# Altium PCB piezo-driver1.PcbDoc (part 1 of 2)
Units mm, origin at the board's own origin, x right, y up, seen from the top; angles counter-clockwise.
Board outline 53.7 x 52 mm, 2 copper layers (Top Layer, Bottom Layer), stack 1.569 mm thick; 104 components, 76 nets, 406 pads, 150 vias.
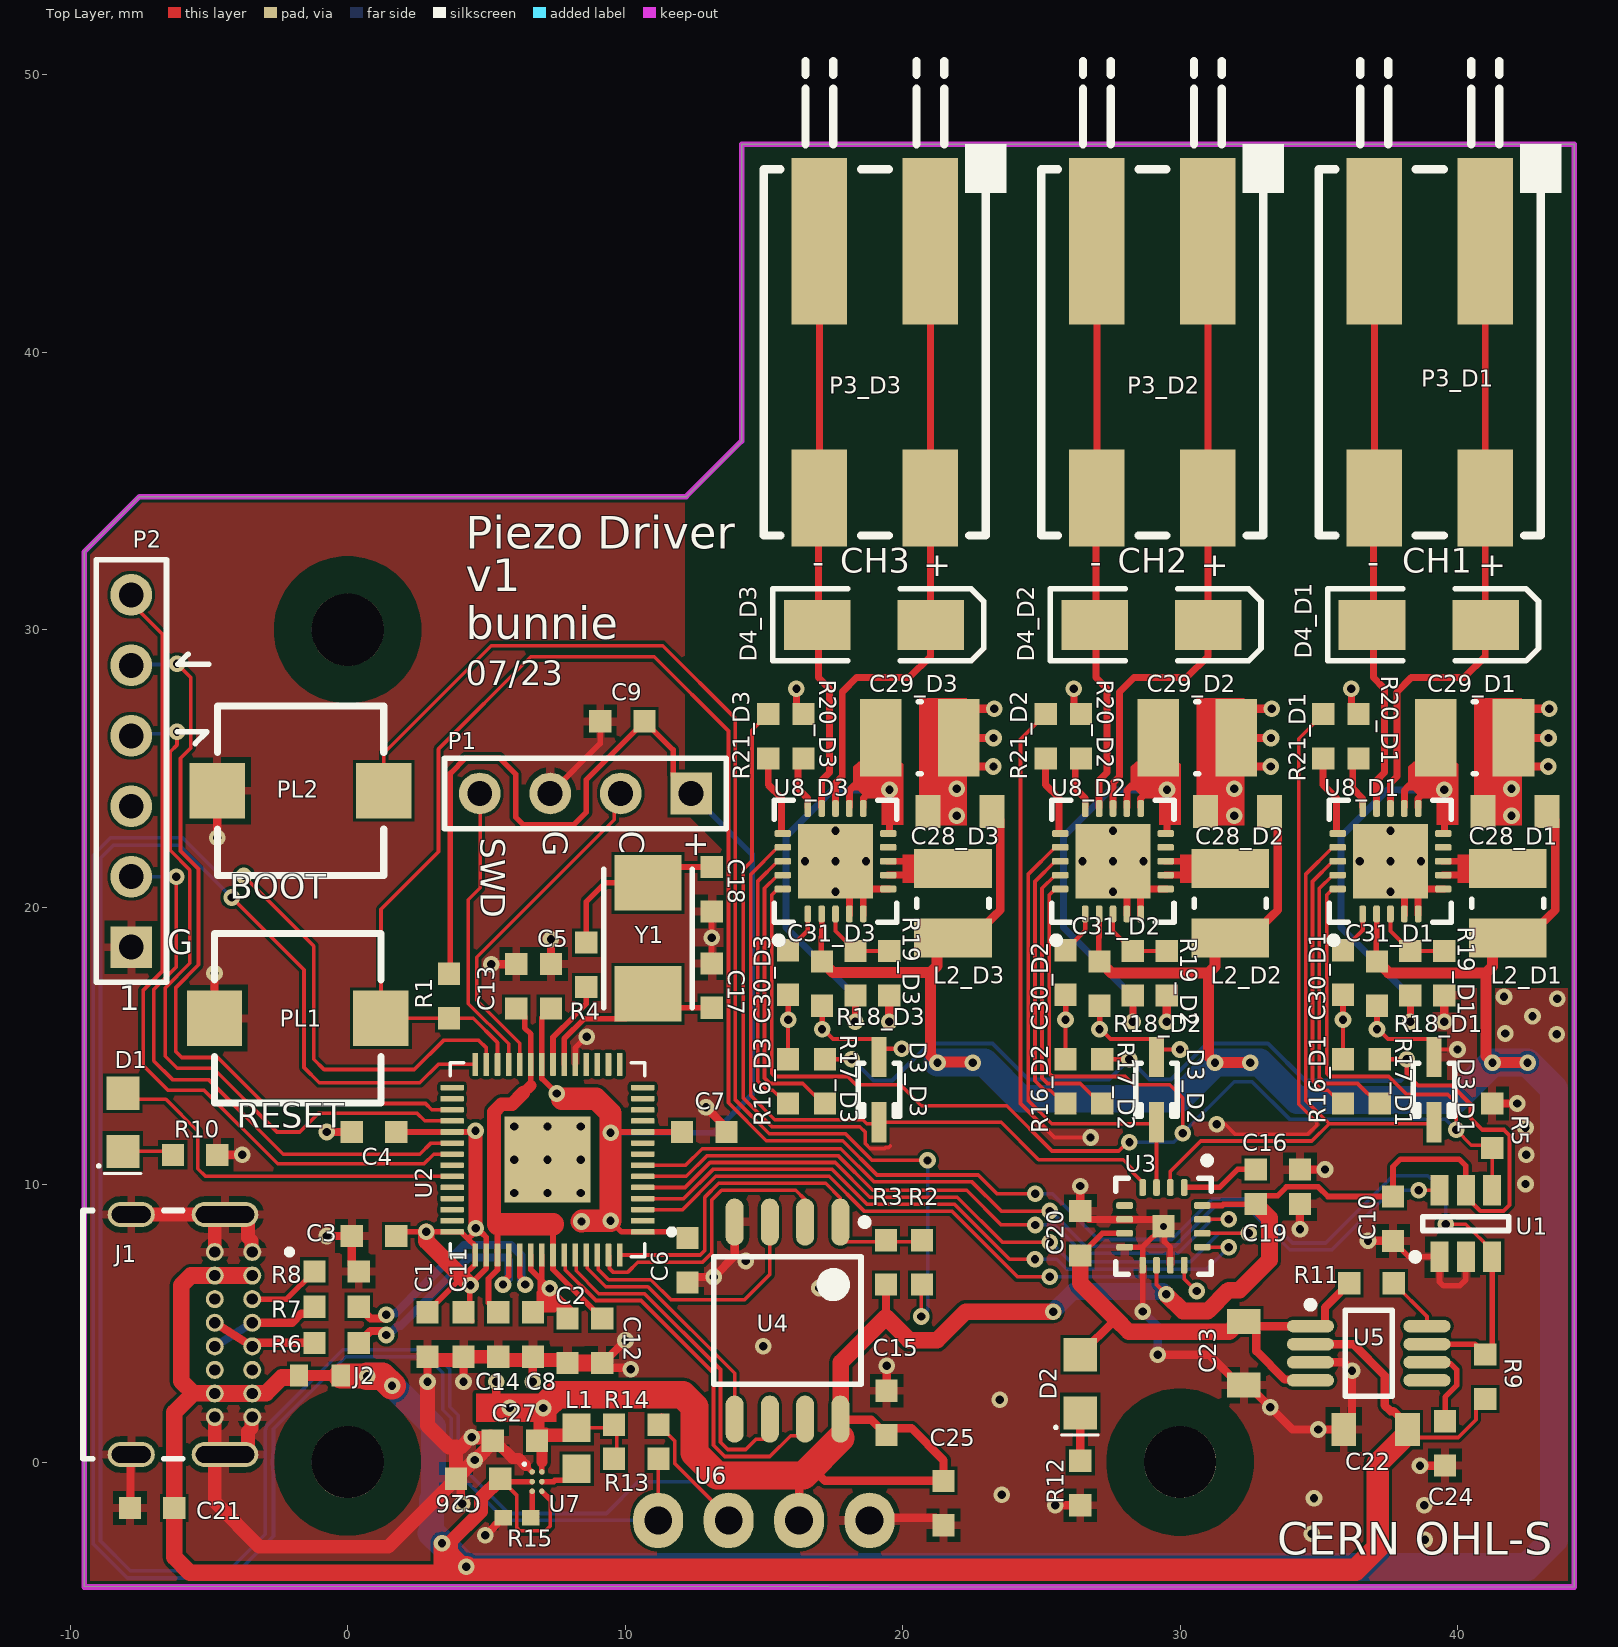
[diagram p0: Top Layer view]
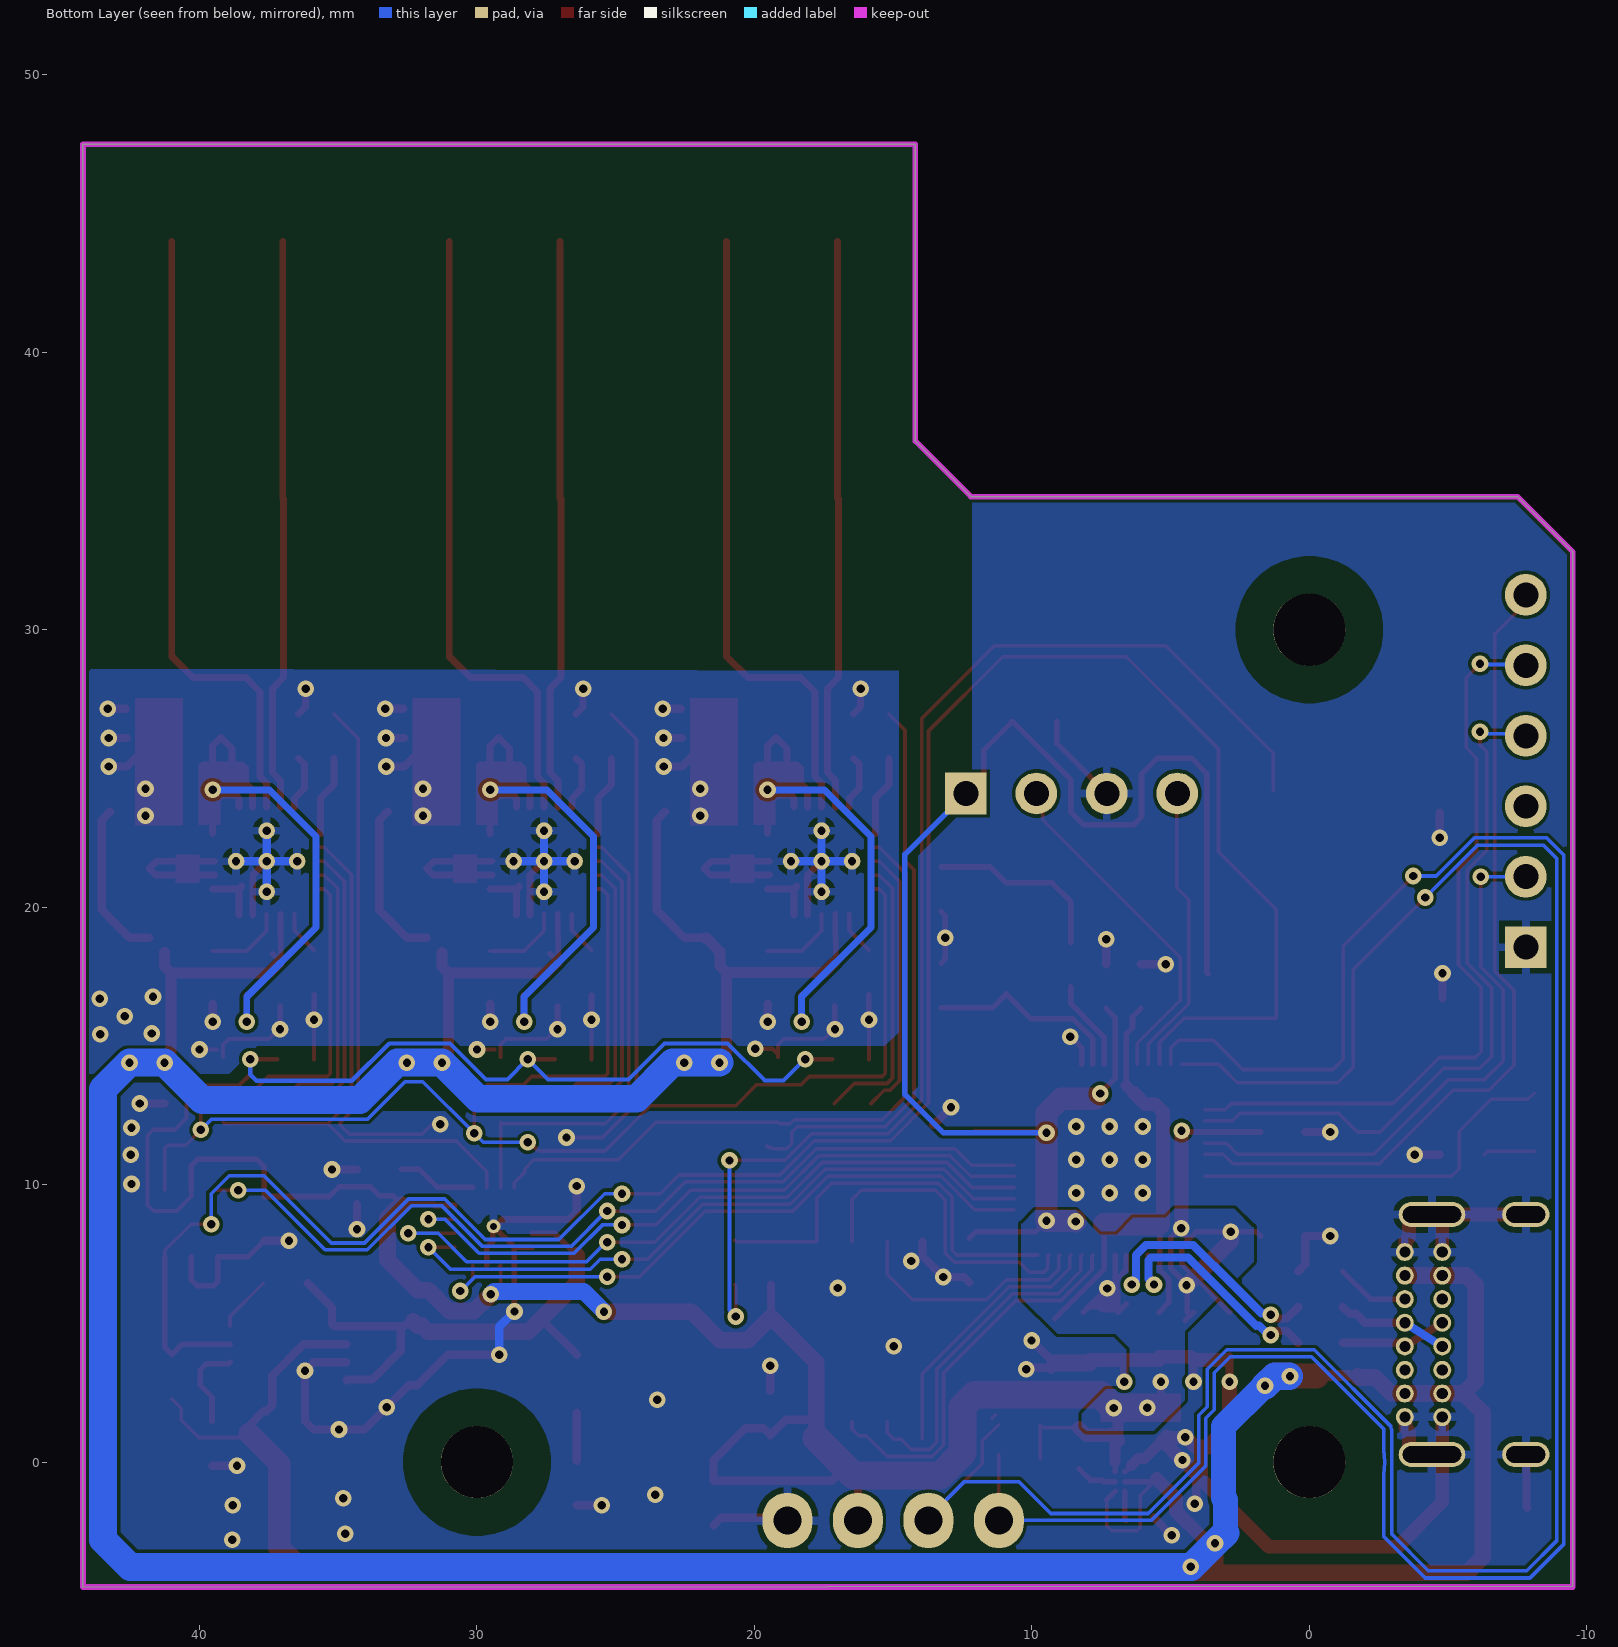
[diagram p1: Bottom Layer view, seen from below]

## Layer stack, top to bottom
Top Solder: solder mask 0.0254, SM-001, Dk 4
Top Layer: signal copper 0.035
Dielectric 1: core 1.4986, Core-043, Dk 4.3
Bottom Layer: signal copper 0.035
Bottom Solder: solder mask 0.0254, SM-001, Dk 4

## Board outline
-9.5,-4.475 -9.5,32.8 -7.5,34.8 12.2,34.8 14.2,36.8 14.2,47.5 44.2,47.5 44.2,-4.475 44.2,-4.5

## Design rules (kind name [scope] priority, off if disabled: settings)
Clearance [All vs IsPad and not PadIsPlated] p1: gap=1.35 ignorepadtopadclearanceinfootprint=FALSE except(0: Arc-Hole Track-Hole SMDPad-Hole THPad-Hole Via-Hole Fill-Hole Poly-Hole Region-Hole Text-Hole)
Clearance Clearance_1 [All] p2: gap=0.12 ignorepadtopadclearanceinfootprint=FALSE except(0: Arc-Hole Track-Hole SMDPad-Hole THPad-Hole Via-Hole Fill-Hole Poly-Hole Region-Hole Text-Hole)
ComponentClearance [All] p1 off: gap=0.254 collisioncheckmode=3 verticalgap=0.254 showdistances=FALSE
DiffPairsRouting [All] p1: maxlimit=0.3 minlimit=0.15 mostfreqgap=0.15 toplayer_minwidth=0.15 toplayer_maxwidth=0.8 toplayer_prefwidth=0.8 bottomlayer_minwidth=0.15 bottomlayer_maxwidth=0.8 bottomlayer_prefwidth=0.8 maxuncoupledlength=12.7
HoleSize [All] p1: absolutevalues=TRUE maxlimit=2.7 minlimit=0.025 maxpercent=80.000 minpercent=20.000
MinimumSolderMaskSliver [All] p1 off: minsoldermaskwidth=0.254
PolygonConnect [All] p1: thpad.connectstyle=Relief thpad.reliefconductorwidth=0.3 thpad.reliefentries=4 thpad.polygonreliefangle="90 Angle" thpad.airgapwidth=0.2 smdpad.connectstyle=Relief smdpad.reliefconductorwidth=0.3 smdpad.reliefentries=4 smdpad.polygonreliefangle="90 Angle" smdpad.airgapwidth=0.2 via.connectstyle=Direct via.reliefconductorwidth=0.254 via.reliefentries=4 via.polygonreliefangle="90 Angle" via.airgapwidth=0.254
RoomDefinition D3 [InComponentClass('D3')] p1: confinementstyle=ConfineIn formatcopy=TRUE lockcomponents=FALSE outline 14.273,11.199 24.223,11.199 24.223,50.924 14.273,50.924
RoomDefinition D2 [InComponentClass('D2')] p2: confinementstyle=ConfineIn formatcopy=TRUE lockcomponents=FALSE outline 24.273,11.199 34.223,11.199 34.223,50.924 24.273,50.924
RoomDefinition D1 [InComponentClass('D1')] p3: confinementstyle=ConfineIn formatcopy=TRUE lockcomponents=FALSE outline 34.273,11.199 44.223,11.199 44.223,50.924 34.273,50.924
RoutingVias [All] p1: holewidth=0.3 width=0.6 viastyle="Through Hole" minholewidth=0.3 minwidth=0.6 maxholewidth=0.3 maxwidth=0.6
SilkToSilkClearance [All] p1 off: silktosilkclearance=0.254
SilkToSolderMaskClearance [IsPad] p1 off: minsilkscreentomaskgap=0.254 clearancetoexposedcopper=TRUE
SolderMaskExpansion [All] p1: expansion=0.07 istentingtop=FALSE
Width [All] p1: maxlimit=5 minlimit=0.13 preferedwidth=0.15
24 further rules are at their usual default settings.

## Classes and differential pairs
channel class driver: D1 D2 D3
component class D3: C28_D3 C29_D3 C30_D3 C31_D3 D3_D3 D4_D3 L2_D3 P3_D3 R16_D3 R17_D3 R18_D3 R19_D3 R20_D3 R21_D3 U8_D3
component class D2: C28_D2 C29_D2 C30_D2 C31_D2 D3_D2 D4_D2 L2_D2 P3_D2 R16_D2 R17_D2 R18_D2 R19_D2 R20_D2 R21_D2 U8_D2
component class D1: C28_D1 C29_D1 C30_D1 C31_D1 D3_D1 D4_D1 L2_D1 P3_D1 R16_D1 R17_D1 R18_D1 R19_D1 R20_D1 R21_D1 U8_D1
component class controller: C1 C2 C3 C4 C5 C6 C7 C8 C9 C10 C11 C12 C13 C14 C15 C16 C17 C18 C19 C20 C21 C22 C23 C24 C25 C26 C27 D1 D2 J1 J2 L1 NT1 P1 P2 PL1 PL2 R1 R2 R3 R4 R5 R6 R7 R8 R9 R10 R11 R12 R13 R14 R15 U1 U2 U3 U4 U5 U6 U7 Y1
differential pair USB: +USB_P -USB_N
differential pair RPUSB: +RPUSB_P -RPUSB_N

## Components (designator, comment, footprint, x,y, rotation, side; value= is the part's Value field where it differs from the comment)
C1 "0.1uF, 25V, X7R" B_CAP0603 2.875,4.6 r270 top
C2 "0.1uF, 25V, X7R" B_CAP0603 7.925,4.375 r270 top
C3 "0.1uF, 25V, X7R" B_CAP0603 0.95,8.15 r180 top
C4 "0.1uF, 25V, X7R" B_CAP0603 0.95,11.9 r180 top
C5 "0.1uF, 25V, X7R" B_CAP0603 7.325,17.15 r90 top
C6 "0.1uF, 25V, X7R" B_CAP0603 12.25,7.275 r270 top
C7 "2.2uF, 16V, X5R" B_CAP0603 12.852,11.905 r0 top
C8 "2.2uF, 16V, X5R" B_CAP0603 6.675,4.6 r270 top
C9 "0.1uF, 25V, X7R" B_CAP0603 9.9,26.7 r180 top
C10 "0.1uF, 25V, X7R" B_CAP0603 37.675,8.775 r270 top
C11 "2.2uF, 16V, X5R" B_CAP0603 4.175,4.6 r270 top
C12 "0.1uF, 25V, X7R" B_CAP0603 9.175,4.375 r270 top
C13 "0.1uF, 25V, X7R" B_CAP0603 6.075,17.15 r90 top
C14 "2.2uF, 16V, X5R" B_CAP0603 5.425,4.6 r270 top
C15 "0.1uF, 25V, X7R" B_CAP0603 19.425,1.775 r270 top
C16 "DNP" B_CAP0603 33.525,10.55 r0 top
C17 "15pF, 50V, NP0" B_CAP0603 13.125,17.175 r270 top
C18 "15pF, 50V, NP0" B_CAP0603 13.125,20.65 r90 top
C19 "0.1uF, 25V, X7R" B_CAP0603 33.525,9.3 r0 top
C20 "0.1uF, 25V, X7R" B_CAP0603 26.4,8.25 r90 top
C21 "10uF, 6.3V, X5R" B_CAP0603 -7.05,-1.65 r180 top
C22 "10uF, 25V, X5R" B_CAP0805 37.05,1.175 r180 top
C23 "10uF, 25V, X5R" B_CAP0805 32.3,3.925 r270 top
C24 "0.033uF, 50V, X7R" B_CAP0603 39.55,0.675 r90 top
C25 "2.2uF, 16V, X5R" B_CAP0603 21.475,-1.475 r270 top
C26 "10uF, 6.3V, X5R" B_CAP0603 4.7,-0.6 r180 top
C27 "10uF, 6.3V, X5R" B_CAP0603 6.025,0.775 r180 top
C28_D1 "10uF, 25V, X5R" B_CAP0805 42.068,23.447 r180 top (schematic designator C28)
C28_D2 "10uF, 25V, X5R" B_CAP0805 32.068,23.447 r180 top (schematic designator C28)
C28_D3 "10uF, 25V, X5R" B_CAP0805 22.068,23.447 r180 top (schematic designator C28)
C29_D1 "0.22uF, 250V X7R" B_CAP1210 40.619,26.114 r0 top (schematic designator C29)
C29_D2 "0.22uF, 250V X7R" B_CAP1210 30.619,26.114 r0 top (schematic designator C29)
C29_D3 "0.22uF, 250V X7R" B_CAP1210 20.619,26.114 r0 top (schematic designator C29)
C30_D1 "0.1uF, 25V, X7R" B_CAP0603 35.873,17.649 r270 top (schematic designator C30)
C30_D2 "0.1uF, 25V, X7R" B_CAP0603 25.873,17.649 r270 top (schematic designator C30)
C30_D3 "0.1uF, 25V, X7R" B_CAP0603 15.873,17.649 r270 top (schematic designator C30)
C31_D1 "0.1uF, 25V, X7R" B_CAP0603 37.098,17.249 r270 top (schematic designator C31)
C31_D2 "0.1uF, 25V, X7R" B_CAP0603 27.098,17.249 r270 top (schematic designator C31)
C31_D3 "0.1uF, 25V, X7R" B_CAP0603 17.098,17.249 r270 top (schematic designator C31)
D1 "white LED" B_LED0805 -8.1,12.25 r90 top
D2 "white LED" B_LED0805 26.4,2.825 r90 top
D3_D1 "BZX38450-C1V8F" SOD-323 39.148,13.424 r270 top (schematic designator D3)
D3_D2 "BZX38450-C1V8F" SOD-323 29.148,13.424 r270 top (schematic designator D3)
D3_D3 "BZX38450-C1V8F" SOD-323 19.148,13.424 r270 top (schematic designator D3)
D4_D1 "CDBA2200-HF" DSO-C2/X1.8 38.968,30.178 r0 top (schematic designator D4)
D4_D2 "CDBA2200-HF" DSO-C2/X1.8 28.968,30.178 r0 top (schematic designator D4)
D4_D3 "CDBA2200-HF" DSO-C2/X1.8 18.968,30.178 r0 top (schematic designator D4)
J1 "USB4085-GF-A_REVB" GCT_USB4085-GF-A_REVB -7.8,4.6 r270 top
J2 "power tap (DNP)" RESTAP-0603 -1,3.125 r0 top
L1 "0.47uH 0603" B_IND0603 8.25,0.5 r90 top
L2_D1 "3.3uH SRP3212A-3R3M" B_IND1210_BOURNES 41.814,20.145 r270 top (schematic designator L2)
L2_D2 "3.3uH SRP3212A-3R3M" B_IND1210_BOURNES 31.814,20.145 r270 top (schematic designator L2)
L2_D3 "3.3uH SRP3212A-3R3M" B_IND1210_BOURNES 21.814,20.145 r270 top (schematic designator L2)
P1 "Header 4" HDR1X4 12.38,24.1 r180 top
P2 "Male 2.54mm 6x1 header" HDR1X6 -7.8,18.56 r90 top
P3_D1 "2060-472/998-404" WAGO_2060-472/998-404 41,44 r270 top (schematic designator P3)
P3_D2 "2060-472/998-404" WAGO_2060-472/998-404 31,44 r270 top (schematic designator P3)
P3_D3 "2060-472/998-404" WAGO_2060-472/998-404 21,44 r270 top (schematic designator P3)
PL1 "6mm square tact" PANASONIC_EVPAS -1.8,16 r180 top
PL2 "6mm square tact" PANASONIC_EVPAS -1.7,24.2 r180 top
R1 "10k, 1%" B_RES0603 3.65,16.8 r270 top
R2 "1k, 1%" B_RES0603 20.7,7.2 r270 top
R3 "10k, 1%" B_RES0603 19.4,7.2 r270 top
R4 "1k, 1%" B_RES0603 8.6,17.925 r90 top
R5 "10k, 1%" B_RES0603 41.25,12.125 r90 top
R6 "27, 1%" B_RES0603 -0.4,4.3 r0 top
R7 "27, 1%" B_RES0603 -0.4,5.6 r0 top
R8 "5.1k, 1%" B_RES0603 -0.4,6.875 r180 top
R9 "DNP" B_RES0603 41,3.075 r90 top
R10 "51, 1%" B_RES0603 -5.5,11.075 r180 top
R11 "100k, 1%" B_RES0603 36.9,6.45 r180 top
R12 "51, 1%" B_RES0603 26.4,-0.75 r90 top
R13 "1k, 1%" B_RES0603 10.4,0.125 r180 top
R14 "1k, 1%" B_RES0603 10.4,1.35 r180 top
R15 "249k, 1%, +/-200ppm" B_RES0402 6.1,-2 r180 top
R16_D1 "10k, 1%" B_RES0603 35.873,13.724 r90 top (schematic designator R16)
R16_D2 "10k, 1%" B_RES0603 25.873,13.724 r90 top (schematic designator R16)
R16_D3 "10k, 1%" B_RES0603 15.873,13.724 r90 top (schematic designator R16)
R17_D1 "10k, 1%" B_RES0603 37.198,13.724 r270 top (schematic designator R17)
R17_D2 "10k, 1%" B_RES0603 27.198,13.724 r270 top (schematic designator R17)
R17_D3 "10k, 1%" B_RES0603 17.198,13.724 r270 top (schematic designator R17)
R18_D1 "820k, 1%" B_RES0603 38.298,17.624 r270 top (schematic designator R18)
R18_D2 "820k, 1%" B_RES0603 28.298,17.624 r270 top (schematic designator R18)
R18_D3 "820k, 1%" B_RES0603 18.298,17.624 r270 top (schematic designator R18)
R19_D1 "10k, 1%" B_RES0603 39.522,17.622 r90 top (schematic designator R19)
R19_D2 "10k, 1%" B_RES0603 29.522,17.622 r90 top (schematic designator R19)
R19_D3 "10k, 1%" B_RES0603 19.522,17.622 r90 top (schematic designator R19)
R20_D1 "10k, 1%" B_RES0603 36.428,26.162 r90 top (schematic designator R20)
R20_D2 "10k, 1%" B_RES0603 26.428,26.162 r90 top (schematic designator R20)
R20_D3 "10k, 1%" B_RES0603 16.428,26.162 r90 top (schematic designator R20)
R21_D1 "100, 1%" B_RES0603 35.158,26.162 r90 top (schematic designator R21)
R21_D2 "100, 1%" B_RES0603 25.158,26.162 r90 top (schematic designator R21)
R21_D3 "100, 1%" B_RES0603 15.158,26.162 r90 top (schematic designator R21)
U1 "SN74AUP1T97DBVR" SOT26A-6N 40.3,8.6 r90 top
U2 "RP2040" QFN40P700X700X90-57N 7.2,10.9 r180 top
U3 "DAC70504" QFN50P300X300X80_HS-17N 29.4,8.5 r270 top
U4 "W25Q16JVSSIQ" SOIC127P790X216-8N 15.85,5.1 r270 top
U5 "LP3982IMM-3.3/NOPB" MUA08A_N 36.8,3.925 r0 top
U6 "ER-OLEDM0.66-1W-I2C" ER-OLEDM0.66-1W-I2C 15,-2.1 r180 top locked
U7 "TPS62802" BGA6C35P2X3_70X105X40_NSMD 6.825,-0.7 r0 top
U8_D1 "DRV2700RGPR" QFN50P400X400X100_HS-21N_DRV2700 37.582,21.658 r90 top (schematic designator U8)
U8_D2 "DRV2700RGPR" QFN50P400X400X100_HS-21N_DRV2700 27.582,21.658 r90 top (schematic designator U8)
U8_D3 "DRV2700RGPR" QFN50P400X400X100_HS-21N_DRV2700 17.582,21.658 r90 top (schematic designator U8)
Y1 "12.0000 MHz 12pF" NDK_NX5032A 10.825,16.875 r90 top

## Footprints (in the part's own frame and the unit in brackets; to place one, negate y for a bottom-side part, rotate by r counter-clockwise, add the part's x,y. Pads: shape width x height; smd on the part's side, far side on the other; paste and mask are expansions set on the pad)
B_CAP0603 [mm] "Capacitor 0603"
  rect 0.8x0.8 smd mask+0.07: 1(-0.8,0) 2(0.8,0)
  body extent -0.85,-0.45 0.85,0.45, height 0.9
B_CAP0805 [mm] "Capacitor 0805"
  rect 0.9x1.2 smd: 1(-1.15,0) 2(1.15,0)
  body extent -1.1,-0.7 1.1,0.7, height 0.6
B_CAP1210 [mm]
  rect 1.5x2.8 smd: 1(-1.4,0) 2(1.4,0)
  silkscreen extent -0.05,-1.3 0.05,1.3, body extent -1.75,-1.4 1.75,1.4, height 2.3
B_IND0603 [mm] "Inductor 0603"
  rect 1.03x1.02 smd: 1(-0.735,0) 2(0.735,0)
  body extent -0.9,-0.5 0.9,0.5, height 0.8
B_IND1210_BOURNES [mm] "Chip Inductor, 2-Leads, Body 3.20x2.50mm, IPC Medium Density"
  rect 1.4x2.8 smd: 1(-1.25,0) 2(1.25,0)
  silkscreen extent -0.15,-1.3 0.15,1.3, body extent -1.75,-1.4 1.75,1.4, height 1.2
B_LED0805 [mm] "Molded Diode, 2-Leads, Body 2.00x1.25mm, IPC Medium Density"
  rect 1.2x1.2 smd mask+0.07: 1(1.05,0) 2(-1.05,0)
  silkscreen extent -1.85,-0.65 -1.53,0.92, body extent -1,-0.62 1,0.63, height 0.8
B_RES0402 [mm] "Resistor 0402"
  rect 0.63x0.55 smd mask+0.07: 1(-0.5,0) 2(0.5,0)
  body extent -0.53,-0.27 0.53,0.28, height 0.4
B_RES0603 [mm] "Resistor 0603"
  rect 0.8x0.8 smd mask+0.07: 1(-0.8,0) 2(0.8,0)
  body extent -0.85,-0.45 0.85,0.45, height 0.9
BGA6C35P2X3_70X105X40_NSMD [mm] "BGA, 6-Leads, Body 0.70x1.05mmx0.40mm, Pitch 0.35mm"
  round 0.2 smd mask+0.032: A1(-0.175,0.35) A2(0.175,0.35) B1(-0.175,0) B2(0.175,0) C1(-0.175,-0.35) C2(0.175,-0.35)
  silkscreen extent -0.5,0.58 -0.41,0.68, body extent -0.35,-0.53 0.35,0.53, height 0.4
DSO-C2/X1.8 [mm] "DO-214-AC/SMA; 2 C-Bend Leads; Body 5 x 2.7 mm, inc. leads (LxW)"
  rect 2.4x1.8 smd: 1(-2.05,0) 2(2.05,0)
  silkscreen extent -3.65,-1.3 3.95,1.3
ER-OLEDM0.66-1W-I2C [mm] "0.66\" OLED display module 64x48 I2C"
  oval 1.8x2 hole 1: 1(-3.81,0) 2(-1.27,0) 3(1.27,0) 4(3.81,0)
  body extent -9.5,-22.2 9.5,1.3, height 5.3
GCT_USB4085-GF-A_REVB [mm]
  round 0.65 hole 0.4: A1(-2.975,4.36) A4(-2.125,4.36) A5(-1.275,4.36) A6(-0.425,4.36) A7(0.425,4.36) A8(1.275,4.36) A9(2.125,4.36) A12(2.975,4.36) B1(2.975,3.01) B4(2.125,3.01) B5(1.275,3.01) B6(0.425,3.01) B7(-0.425,3.01) B8(-1.275,3.01) B9(-2.125,3.01) B12(-2.975,3.01)
  oval 0.9x1.7 hole 0.6 slot 1.4 at 90 deg: S1(-4.325,0) S2(4.325,0)
  oval 0.9x2.4 hole 0.6 slot 2.1 at 90 deg: S3(-4.325,3.38) S4(4.325,3.38)
  silkscreen extent -4.47,-1.74 4.47,5.8, body extent -4.47,-4.25 4.47,4.92, height 3.46
HDR1X4 [mm]
  rect 1.5x1.5 hole 0.9: 1(0,0)
  round 1.5 hole 0.9: 2(2.54,0) 3(5.08,0) 4(7.62,0)
  silkscreen extent -1.27,-1.27 8.89,1.27
HDR1X6 [mm]
  rect 1.5x1.5 hole 0.9: 1(0,0)
  round 1.5 hole 0.9: 2(2.54,0) 3(5.08,0) 4(7.62,0) 5(10.16,0) 6(12.7,0)
  silkscreen extent -1.27,-1.27 13.97,1.27
MUA08A_N [mm] "TSOP, 8-Leads, Body 3x3mm, Pitch 0.65mm, IPC Medium Density"
  oval 1.7x0.45 smd: 1(-2.1,0.975) 2(-2.1,0.325) 3(-2.1,-0.325) 4(-2.1,-0.975) 5(2.1,-0.975) 6(2.1,-0.325) 7(2.1,0.325) 8(2.1,0.975)
  silkscreen extent -2.22,-1.55 0.85,1.87, body extent -1.55,-1.55 1.55,1.55, height 1.09
NDK_NX5032A [mm] "5x3.2mm crystal, SMT"
  rect 2x2.4 smd: 1(0,0) 2(4,0)
  silkscreen extent -0.5,-1.6 4.5,1.6
PANASONIC_EVPAS [mm] "Tactile switch EVPAS series"
  rect 2x2 smd: 1(-3,0) 2(3,0)
  silkscreen extent -3,-3.05 3,3.05, body extent -3,-3.05 3,3.05, height 5
QFN40P700X700X90-57N [mm]
  rrect25% 0.84x0.2 smd: 1(-3.435,2.6) 2(-3.435,2.2) 3(-3.435,1.8) 4(-3.435,1.4) 5(-3.435,1) 6(-3.435,0.6) 7(-3.435,0.2) 8(-3.435,-0.2) 9(-3.435,-0.6) 10(-3.435,-1) 11(-3.435,-1.4) 12(-3.435,-1.8) 13(-3.435,-2.2) 14(-3.435,-2.6) 29(3.435,-2.6) 30(3.435,-2.2) 31(3.435,-1.8) 32(3.435,-1.4) 33(3.435,-1) 34(3.435,-0.6) 35(3.435,-0.2) 36(3.435,0.2) 37(3.435,0.6) 38(3.435,1) 39(3.435,1.4) 40(3.435,1.8) 41(3.435,2.2) 42(3.435,2.6)
  rrect25% 0.2x0.84 smd: 15(-2.6,-3.435) 16(-2.2,-3.435) 17(-1.8,-3.435) 18(-1.4,-3.435) 19(-1,-3.435) 20(-0.6,-3.435) 21(-0.2,-3.435) 22(0.2,-3.435) 23(0.6,-3.435) 24(1,-3.435) 25(1.4,-3.435) 26(1.8,-3.435) 27(2.2,-3.435) 28(2.6,-3.435) 43(2.6,3.435) 44(2.2,3.435) 45(1.8,3.435) 46(1.4,3.435) 47(1,3.435) 48(0.6,3.435) 49(0.2,3.435) 50(-0.2,3.435) 51(-0.6,3.435) 52(-1,3.435) 53(-1.4,3.435) 54(-1.8,3.435) 55(-2.2,3.435) 56(-2.6,3.435)
  rect 3.1x3.1 smd paste-0.57: 57(0,0)
  silkscreen extent -4.57,-3.5 3.5,3.5, body extent -3.5,-3.5 3.5,3.5, height 0.9
QFN50P300X300X80_HS-17N [mm] "QFN, 16-Leads, Body 3.00x3.00mm, Pitch 0.50mm, Thermal Pad 0.80x0.80mm, IPC Medium Density"
  rrect50% 0.6x0.24 smd mask+0.07: 1(-1.4,0.75) 2(-1.4,0.25) 3(-1.4,-0.25) 4(-1.4,-0.75) 9(1.4,-0.75) 10(1.4,-0.25) 11(1.4,0.25) 12(1.4,0.75)
  rrect50% 0.24x0.6 smd mask+0.07: 5(-0.75,-1.4) 6(-0.25,-1.4) 7(0.25,-1.4) 8(0.75,-1.4) 13(0.75,1.4) 14(0.25,1.4) 15(-0.25,1.4) 16(-0.75,1.4)
  rect 0.8x0.8 smd mask+0.07: 17(0,0)
  round 0.5 hole 0.25: 17(0,0)
  silkscreen extent -2.5,-1.73 1.73,1.73, body extent -1.58,-1.58 1.58,1.58, height 0.8
QFN50P400X400X100_HS-21N_DRV2700 [mm] "QFN, 20-Leads, Body 4.00x4.00mm, Pitch 0.50mm, Thermal Pad 2.70x2.70mm, IPC Medium Density"
  rrect50% 0.6x0.24 smd mask+0.07: 1(-1.9,1) 2(-1.9,0.5) 3(-1.9,0) 4(-1.9,-0.5) 5(-1.9,-1) 11(1.9,-1) 12(1.9,-0.5) 13(1.9,0) 14(1.9,0.5) 15(1.9,1)
  rrect50% 0.24x0.6 smd mask+0.07: 6(-1,-1.9) 7(-0.5,-1.9) 8(0,-1.9) 9(0.5,-1.9) 10(1,-1.9) 16(1,1.9) 17(0.5,1.9) 18(0,1.9) 19(-0.5,1.9) 20(-1,1.9)
  round 0.5 / inner round 0.6 / far side round 0.6 hole 0.3 mask+0.07: 21(-1.1,0) 21(0,1.1) 21(0,0) 21(0,-1.1) 21(1.1,0)
  rect 2.7x2.7 smd paste-10 mask+0.07: 21(0,0)
  silkscreen extent -2.97,-2.2 2.2,2.2, body extent -2.05,-2.05 2.05,2.05, height 1
RESTAP-0603 [mm] "0603 Power tap, cut-trace style"
  rect 0.65x0.8 smd: 1(-0.75,0) 1(0.75,0)
  Top Layer region: -0.5,-0.2 0.5,-0.2 0.5,0.2 -0.5,0.2
  body extent -0.8,-0.4 0.8,0.4, height 0.8
SOD-323 [mm] "SOD-323/SC-76; 2 Leads; Body 1.7 x 1.3 mm, (LxW)"
  rect 1.45x0.55 smd: 1(1.175,0) 2(-1.175,0)
  silkscreen extent -0.95,-0.75 0.95,0.75
SOIC127P790X216-8N [mm] "SOIC, 8-Leads, Body 5.23x5.28mm, Pitch 1.27mm, IPC Medium Density"
  oval 1.7x0.65 smd: 1(-3.55,1.905) 2(-3.55,0.635) 3(-3.55,-0.635) 4(-3.55,-1.905) 5(3.55,-1.905) 6(3.55,-0.635) 7(3.55,0.635) 8(3.55,1.905)
  silkscreen extent -3.67,-2.65 2.3,2.9, body extent -2.7,-2.65 2.7,2.65, height 2.16
SOT26A-6N [mm] "SOT23, 6-Leads, Body 2.9x1.7mm, Pitch 0.95mm, Lead Span 2.8mm, IPC Medium Density"
  rect 1.1x0.65 smd: 1(-1.2,0.95) 2(-1.2,0) 3(-1.2,-0.95) 4(1.2,-0.95) 5(1.2,0) 6(1.2,0.95)
  silkscreen extent -1.32,-1.55 0.25,1.95, body extent -0.9,-1.55 0.9,1.55, height 1.45
WAGO_2060-472/998-404 [mm] "SMD PCB terminal block; push-button"
  rect 6x2 smd: 1(0,0) 2(0,-4)
  rect 3.5x2 smd: 1(9.25,0) 2(9.25,-4)
  silkscreen extent -6.5,-6 10.6,2, body extent -2.55,-5.95 10.55,1.95, height 4.5

## Part data
C1 C2 C3 C4 C5 C6 C9 C10 C12 C13 C15 C19 C20 C30_D1 C30_D2 C30_D3 C31_D1 C31_D2 C31_D3: library part "Cap Semi", "Capacitor (Semiconductor SIM Model)", MPN=CC0603KRX7R8BB104, MYPN=C-104-25-X7R-0603, VENDOR=Murata
C7 C8 C11 C14 C25: library part "Cap Semi", "Capacitor (Semiconductor SIM Model)", MPN=CL10A225KO8NNNC, MYPN=C-225-16-X5R-0603, VENDOR=Samsung
C16: library part "Cap Semi", "Capacitor (Semiconductor SIM Model)", MPN=DNP, MYPN=DNP, VENDOR=DNP
C17 C18: library part "Cap Semi", "Capacitor (Semiconductor SIM Model)", MPN=CL10C150JB81PNC, MYPN=C-150-50-NP0-0603, VENDOR=Samsung
C21 C26 C27: library part "Cap Semi", "Capacitor (Semiconductor SIM Model)", MPN=CL10A106MQ8NNNC, MYPN=C-106-6.3-X5R-0603, VENDOR=Samsung
C22 C23 C28_D1 C28_D2 C28_D3: library part "Cap Semi", "Capacitor (Semiconductor SIM Model)", MPN=GRM21BR61E106KA73L, MYPN=C-106-25-X5R-0805, VENDOR=Murata
C24: library part "Cap Semi", "Capacitor (Semiconductor SIM Model)", MPN=CL10B333KB8NNNC, MYPN=C-333-50-X7R-0603, VENDOR=Samsung
C29_D1 C29_D2 C29_D3: library part "Cap Semi", "Capacitor (Semiconductor SIM Model)", MPN=GCJ32DR72E224KXJ1L, MYPN=C-224-250-X7R-1210, VENDOR=Murata
D1 D2: library part LED2, "Typical RED, GREEN, YELLOW, AMBER GaAs LED", MPN=EAST2012WA1, MYPN=D-LED-WHITE1-0805, VENDOR=Everlight
D3_D1 D3_D2 D3_D3 D4_D1 D4_D2 D4_D3: library part "D Schottky", "Schottky Diode", Revision="July-2002: Re-released for DXP Platform."
  D3_D1 D3_D2 D3_D3: MPN=BZX38450-C1V8F, MYPN=D-Z-1p8-SOD323, VENDOR=Nexperia
  D4_D1 D4_D2 D4_D3: MPN=CDBA2200-HF, MYPN=D-S-2-200-0p9-SMA, VENDOR=Comchip
J1: "USB-C (USB TYPE-C) USB 2.0 Receptacle Connector 24 (16+8 Dummy) Position Through Hole, Right Angle, low cost, 3.46mm profile, 16 pin, horizontal, Top mount", MPN=USB4085-GF-A, Package=None, Availability="In Stock", Check_prices=https://www.snapeda.com/parts/USB4085-GF-A/Global+Connector+Technology/view-part/?ref=eda, MF="Global Connector Technology", MP=USB4085-GF-A, Price=None, SnapEDA_Link=https://www.snapeda.com/parts/USB4085-GF-A/Global+Connector+Technology/view-part/?ref=snap, VENDOR=GCT
J2: library part CON1, "Connector", MPN=DNP, MYPN=J-TP-PWRTAP-0603, VENDOR=DNP
L1: library part "Inductor Iron", "Magnetic-Core Inductor", MPN=TFM160808ALC-R47MTAA, MYPN=L-TFM160808ALC-R47MTAA, VENDOR=TDK
L2_D1 L2_D2 L2_D3: library part "Inductor Iron", "Magnetic-Core Inductor", MPN=SRP3212A-3R3M, MYPN=L-SRP3212A-3R3M, VENDOR=Bournes
P1: "Header, 4-Pin", MPN="PH1-04-UA / ANY", LatestRevisionDate=17-Jul-2002, LatestRevisionNote="Re-released for DXP Platform.", Publisher="Altium Limited", VENDOR="Adam Tech / ANY"
P2: library part "Header 6", "Header, 6-Pin", MPN="PH1-06-UA / ANY", LatestRevisionDate=17-Jul-2002, LatestRevisionNote="Re-released for DXP Platform.", Publisher="Altium Limited", VENDOR="Adam Tech / ANY"
P3_D1 P3_D2 P3_D3: library part "Header 2", "Header, 2-Pin", LatestRevisionDate=17-Jul-2002, LatestRevisionNote="Re-released for DXP Platform.", MPN=2060-472/998-404, MYPN=J-TB-2P-5.08, Publisher="Altium Limited", VENDOR=WAGO
PL1 PL2: library part "Header 2", "Header, 2-Pin", MPN=EVP-ASAC1A, LatestRevisionDate=17-Jul-2002, LatestRevisionNote="Re-released for DXP Platform.", MYPN=SW-EVQ-P6DB35, Publisher="Altium Limited", VENDOR=Panasonic
R1 R3 R5 R16_D1 R16_D2 R16_D3 R17_D1 R17_D2 R17_D3 R19_D1 R19_D2 R19_D3 R20_D1 R20_D2 R20_D3: library part Res1, "Resistor", MPN=RC0603FR-0710KL, VENDOR=Yageo
  R1 R3 R5 R16_D1 R16_D2 R16_D3 R17_D1 R17_D2 R17_D3 R20_D1 R20_D2 R20_D3: MYPN=R-103-1P-1_16W-0603
  R19_D1 R19_D2 R19_D3: MYPN=R-10K-1P-1_10W-0603
R2 R4 R6 R7 R10 R12 R13 R14 R21_D1 R21_D2 R21_D3: library part Res1, "Resistor", MPN=ANY, VENDOR=ANY
  R2 R4 R13 R14: MYPN=R-102-1P-1_16W-0603
  R6 R7: MYPN=R-270-1P-1_16W-0603
  R10 R12: MYPN=R-510-1P-1_16W-0603
  R21_D1 R21_D2 R21_D3: MYPN=R-101-1P-1_16W-0603
R8: library part Res1, "Resistor", MPN=RC0603FR-075K1L, MYPN=R-512-1P-1_16W-0603, VENDOR=Yageo
R9: library part Res1, "Resistor", MPN=DNP, MYPN=DNP, VENDOR=DNP
R11: library part Res1, "Resistor", MPN=RC0603FR-07100KL, MYPN=R-104-1P-1_16W-0603, VENDOR=Yageo
R15: library part Res1, "Resistor", MPN=RC0402FR-07249KL, MYPN=R-2493-1P-1_16W-0402, VENDOR=Yageo
R18_D1 R18_D2 R18_D3: library part Res1, "Resistor", MPN=RC0603FR-07820KL, MYPN=R-820K-1P-1_10W-0603, VENDOR=Yageo
U1: library part 74AUP1T97L6X, "Low power configurable gate with voltage translator", MPN=SN74AUP1T97DBVR, MYPN=USN74AUP1T97DBVR, VENDOR=TI
U2: "RP2040 chip for Raspberry Pi Pico - ARMÂ® CortexÂ®-M0+ MCU 32-Bit", MPN=SC0914(7/13), Package=None, Availability="In Stock", Check_prices=https://www.snapeda.com/parts/RP2040/Raspberry+Pi/view-part/?ref=eda, MF="Raspberry Pi", MP=RP2040, Price=None, Purchase-URL=https://pricing.snapeda.com/search/part/RP2040/?ref=eda, SnapEDA_Link=https://www.snapeda.com/parts/RP2040/Raspberry+Pi/view-part/?ref=snap, VENDOR="Raspberry Pi"
U3: library part DACx0504, "Quad SPI DAC with internal reference, in 16- (8), 14- (7), and 12-(6) bit variants", MPN=DAC70504RTET, VENDOR=TI
U4: library part EN25P05-50GCP, "16Mbit SPI NOR FLASH", MPN=W25Q16JVSSIQ, MYPN=UW25Q16JVSSIQ, VENDOR=Winbond
U5: "Micropower, Ultra Low-Dropout, Low-Noise, 300mA CMOS Regulator, 8-pin Mini SOIC, Pb-Free", Manufacturer="National Semiconductor", PackageTopMarking=ZXTT*LEUB, PowerWise=N, Code_JEDEC=MO-187-AA, ComponentLink1Description="Manufacturer URL", ComponentLink1URL=http://www.national.com/, ComponentLink2Description="LP3982 Datasheet", ComponentLink2URL=http://www.national.com/ds/LP/LP3982.pdf, ComponentLink3Description="LP3982 Web Page", ComponentLink3URL=http://www.national.com/pf/LP/LP3982.html, ComponentLink4Description="MUA08A Package Page", ComponentLink4URL=http://www.national.com/packaging/folders/mua08a.html, CompType="LDO IC", DatasheetVersion=Mar-2006, High-Reliability=Y, MPN=LP3982IMM-3.3/NOPB, MYPN=ULP3982IMM-3.3/NOPB, PackageDescription="MINI SOIC, .118 x .118 x .034in, 8 Lead, .0256in Pitch", PackageReference=MUA08A, PackageVersion="revF, Apr-2008", PartNumber=LP3982IMM-3.3/NOPB, PinCount=8, RoHS=Y, VENDOR=TI
U6: "0.66\" white OLED module, I2C", MPN=ER-OLEDM0.66-1W-I2C, VENDOR="East Rising"
U7: "Buck regulator, 4MHz, 0.6A, 1.8V-3.3V, low Iq", MPN=TPS62802YKAR, MYPN=U-TPS62802YKA(T/R), VENDOR=TI
U8_D1 U8_D2 U8_D3: "Motor Driver Analog 20-QFN _4x4_", MPN=DRV2700RGP(T/R), Package="VFQFN-20 Texas Instruments", Availability=Unavailable, MF="Texas Instruments", MP=DRV2700RGPR, Price=None, SnapEDA_Link=https://www.snapeda.com/parts/DRV2700RGPR/Texas%20Instruments/view-part/1065208/?ref=snap, VENDOR=TI
Y1: library part XTAL, "Crystal Oscillator", MPN=ECS-120-12-30-JGN-TR, LatestRevisionDate=17-Jul-2002, LatestRevisionNote="Re-released for DXP Platform.", PackageReference=R38, Published=8-Jun-2000, Publisher="Altium Limited", VENDOR=ECS

## Free pads (board coordinates)
  round 2.6 hole 2.6 unplated mask+1.2: 0(0,0) 0(0,30) 0(30,0)

## Via types
v1: diameter 0.6, hole 0.3, Top Layer to Bottom Layer, tented both sides, 141 vias
v2: diameter 0.6, hole 0.3, Top Layer to Bottom Layer, tented top, 9 vias

## Nets (pads, with @x,y where several pads share a name; then routed paths per layer and width w, separated by ;. In a path a pad name is that pad's centre, name@x,y a point inside that pad or via, vN(x,y) a via of type N, cw(c..) or ccw(c..) an arc to the next point about the centre after c; other vN are vias at no path point)
CH0: D3_D1.1 U3.2 U8_D1.17 | length 21.7
  Top Layer w0.13: U3.2@29.65,9.9 29.65,10.475 30.75,11.575 34.749,11.575 35.373,12.199 ; U8_D1.17@35.682,22.158 35.502,22.158 34.523,21.179 34.523,13.049 35.373,12.199 ; D3_D1.1@39.148,12.249 39.098,12.199 35.373,12.199
CH1: D3_D2.1 U3.3 U8_D2.17 | length 17
  Top Layer w0.13: U8_D2.17@25.682,22.158 25.502,22.158 24.523,21.179 24.523,13.049 25.372,12.2 27.179,12.2 27.18,12.199 29.098,12.199 D3_D2.1@29.148,12.249 29.15,12.247 29.15,12.199 U3.3@29.15,9.9
CH2: D3_D3.1 U3.4 U8_D3.17 | length 25.2
  Top Layer w0.13: U8_D3.17@15.682,22.158 15.502,22.158 14.523,21.179 14.523,13.212 15.396,12.339 18.565,12.339 18.705,12.199 19.098,12.199 D3_D3.1@19.148,12.249 23.551,12.249 24.9,10.9 27.95,10.9 28.272,10.578 28.272,10.458 28.65,10.08 U3.4@28.65,9.9
CIPO: U2.6 U3.15 | length 24.3
  Top Layer w0.13: U2.6@10.635,10.3 12.207,10.3 12.957,11.05 17.671,11.05 18.921,9.8 22.307,9.8 23.557,8.55 v1(24.775,8.55) ; U3.15@30.8,8.75 v1(31.75,8.75)
  Bottom Layer w0.13: v1(24.775,8.55) 25.475,8.55 26.5,7.525 29.925,7.525 31.15,8.75 v1(31.75,8.75)
COPI: U2.5 U3.14 | length 25.8
  Top Layer w0.13: U2.5@10.635,9.9 12.161,9.9 13.061,10.8 17.568,10.8 18.818,9.55 21.975,9.55 23.6,7.925 v1(25.3,7.925) ; U3.14@30.8,8.25 v1(32.475,8.25)
  Bottom Layer w0.13: v1(25.3,7.925) 25.35,7.925 26.05,7.225 30.375,7.225 31.4,8.25 v1(32.475,8.25)
CS_N: U2.3 U3.12 | length 23.3
  Top Layer w0.13: U2.3@10.635,9.1 12.068,9.1 13.268,10.3 17.361,10.3 18.611,9.05 21.768,9.05 24.141,6.677 v1(25.309,6.677) ; U3.12@30.15,7.1 30.15,6.6 30.58,6.17 v1(30.6,6.17)
  Bottom Layer w0.13: v1(25.309,6.677) 30.073,6.677 30.58,6.17 v1(30.6,6.17)
GAIN0_D1: R16_D1.1 U8_D1.18 | length 9.8
  Top Layer w0.13: U8_D1.18@35.682,21.658 35.502,21.658 34.773,20.929 34.773,13.742 35.116,13.399 35.323,13.399 R16_D1.1@35.798,12.924
GAIN0_D2: R16_D2.1 U8_D2.18 | length 9.8
  Top Layer w0.13: U8_D2.18@25.682,21.658 25.502,21.658 24.773,20.929 24.773,13.742 25.116,13.399 25.323,13.399 R16_D2.1@25.798,12.924
GAIN0_D3: R16_D3.1 U8_D3.18 | length 9.8
  Top Layer w0.13: U8_D3.18@15.682,21.658 15.502,21.658 14.773,20.929 14.773,13.742 15.116,13.399 15.323,13.399 R16_D3.1@15.798,12.924
GAIN1_D1: R17_D1.2 U8_D1.19 | length 10.2
  Top Layer w0.13: U8_D1.19@35.682,21.158 35.502,21.158 35.023,20.679 35.023,13.845 35.219,13.649 36.398,13.649 R17_D1.2@37.123,12.924
GAIN1_D2: R17_D2.2 U8_D2.19 | length 10.2
  Top Layer w0.13: U8_D2.19@25.682,21.158 25.502,21.158 25.023,20.679 25.023,13.845 25.219,13.649 26.398,13.649 R17_D2.2@27.123,12.924
GAIN1_D3: R17_D3.2 U8_D3.19 | length 10.2
  Top Layer w0.13: U8_D3.19@15.682,21.158 15.502,21.158 15.023,20.679 15.023,13.845 15.219,13.649 16.398,13.649 R17_D3.2@17.123,12.924
GND: C1.2 C2.2 C3.2 C4.2 C5.2 C6.2 C7.2 C8.2 C9.2 C10.2 C11.2 C12.2 C13.2 C14.2 C15.1 C16.2 C17.1 C18.1 C19.2 C20.2 C21.2 C22.2 C23.2 C24.1 C25.2 C26.2 C27.2 C28_D1.2 C28_D2.2 C28_D3.2 C29_D1.2 C29_D2.2 C29_D3.2 C30_D1.2 C30_D2.2 C30_D3.2 C31_D1.2 C31_D2.2 C31_D3.2 D3_D1.2 D3_D2.2 D3_D3.2 J1.A1 J1.A12 J1.B1 J1.B12 J1.S1 J1.S2 J1.S3 J1.S4 P1.3 P2.1 PL1.2 PL2.2 R5.2 R8.1 R10.1 R12.1 R15.2 R16_D1.2 R16_D2.2 R16_D3.2 R19_D1.1 R19_D2.1 R19_D3.1 R20_D1.2 R20_D2.2 R20_D3.2 R21_D1.2 R21_D2.2 R21_D3.2 U1.1 U1.2 U2.19 U2.57 U3.6 U3.8 U3.9 U3.11 U3.17 U4.4 U5.3 U6.1 U7.A1 U8_D1.4 U8_D1.5 U8_D1.6 U8_D1.21 U8_D2.4 U8_D2.5 U8_D2.6 U8_D2.21 U8_D3.4 U8_D3.5 U8_D3.6 U8_D3.21 | length 218.6
  Top Layer w0.13: R21_D3.2@15.158,26.962 14.573,26.377 14.573,21.673 14.25,21.35 14.25,13.132 15.293,12.089 18.461,12.089 18.661,11.889 18.661,11.475 18.835,11.3 19.35,11.3 19.389,11.339 19.5,11.339 19.554,11.393 ; R21_D2.2@25.158,26.962 24.25,26.054 24.25,12.925 25.475,11.7 v1(26.775,11.7) ; v1(31.325,12.175) 31.625,12.175 31.975,11.825 34.6,11.825 34.921,12.146 34.921,12.254 34.273,12.902 34.273,26.077 R21_D1.2@35.158,26.962
  Top Layer w0.15: R16_D3.2@15.873,14.524 v1(15.873,15.949) ; v1(17.098,15.599) 17.14,15.599 17.49,15.249 18.948,15.249 19.148,15.049 D3_D3.2@19.148,14.7 ; D3_D3.2@19.148,14.599 D3_D3.2@19.148,14.7 ; v1(19.975,14.9) 19.348,14.9 D3_D3.2@19.148,14.7 ; R16_D2.2@25.873,14.524 v1(25.873,15.949) ; v1(27.098,15.599) 27.14,15.599 27.49,15.249 28.948,15.249 29.148,15.049 D3_D2.2@29.148,14.599 ; D3_D2.2@29.373,14.875 v1(30,14.875) ; R16_D1.2@35.873,14.524 v1(35.873,15.949) ; v1(37.098,15.599) 37.14,15.599 37.49,15.249 38.948,15.249 39.148,15.049 D3_D1.2@39.148,14.599 ; D3_D1.2@39.373,14.875 v1(40,14.875)
  Top Layer w0.2: 6.412,-0.113 U7.A1@6.65,-0.35 ; P1.3@7.3,24.1 9.1,25.9 C9.2@9.1,26.7 ; U2.19@8.2,14.335 8.2,14.926 v1(8.612,15.338) ; C17.1@13.275,17.975 13.125,18.125 v1(13.125,18.9) 13.125,19.7 C18.1@13.275,19.85 ; v1(15.873,15.949) C30_D3.2@15.873,16.849 ; v1(17.098,15.599) C31_D3.2@17.098,16.449 ; v1(25.873,15.949) C30_D2.2@25.873,16.849 ; v1(27.098,15.599) C31_D2.2@27.098,16.449 ; U3.8@28,7.75 28.65,7.75 ; v1(28.65,5.43) U3.9@28.65,7.1 28.65,7.75 ; U3.11@29.65,7.1 29.65,7.734 29.434,7.95 29.434,8.466 U3.17@29.4,8.5 28.65,7.75 ; v1(35.873,15.949) C30_D1.2@35.873,16.849 ; v1(37.098,15.599) C31_D1.2@37.098,16.449 ; C10.2@37.675,7.975 38.25,7.4 U1.1@39.35,7.4 39.35,6.5 39.5,6.35 40.075,6.35 40.3,6.575 U1.2@40.3,7.4
  Top Layer w0.25: v1(16.173,27.874) 16.173,27.217 R20_D3.2@16.428,26.962 ; U8_D3.21@17.582,21.658 18.082,21.158 U8_D3.4@18.082,19.713 ; U8_D3.21@18.482,20.758 18.482,20.717 18.582,20.617 U8_D3.5@18.582,19.758 U8_D3.5@18.582,19.713 ; U8_D3.21@18.623,20.658 U8_D3.6@19.527,20.658 ; v1(26.173,27.874) 26.173,27.217 R20_D2.2@26.428,26.962 ; C20.2@26.4,9.05 26.7,8.75 U3.6@28,8.75 29.082,8.75 29.332,8.5 U3.17@29.4,8.5 ; U8_D2.21@27.582,21.658 28.082,21.158 U8_D2.4@28.082,19.713 ; U8_D2.21@28.482,20.758 28.482,20.717 28.582,20.617 U8_D2.5@28.582,19.758 U8_D2.5@28.582,19.713 ; U8_D2.21@28.623,20.658 U8_D2.6@29.527,20.658 ; v1(36.173,27.874) 36.173,27.217 R20_D1.2@36.428,26.962 ; U8_D1.21@37.582,21.658 38.082,21.158 U8_D1.4@38.082,19.713 ; U8_D1.21@38.482,20.758 38.482,20.717 38.582,20.617 U8_D1.5@38.582,19.758 U8_D1.5@38.582,19.713 ; U8_D1.21@38.623,20.658 U8_D1.6@39.527,20.658
  Top Layer w0.3: C21.2@-7.85,-1.65 -7.825,-1.625 -7.825,0.25 J1.S2@-7.8,0.275 ; PL1.2@-4.8,16.725 v1(-4.8,17.625) ; R10.1@-4.7,11.075 v1(-3.8,11.075) ; v1(-4.7,22.5) PL2.2@-4.7,23.4 ; v1(-0.75,8.15) C3.2@0.15,8.15 0.15,7.125 R8.1@0.4,6.875 ; v1(-0.75,11.9) C4.2@0.15,11.9 ; v1(2.875,2.9) C1.2@2.875,3.8 C1.2@2.988,3.688 ; C26.2@3.9,-0.6 4.073,-0.773 4.073,-1.44 v1(4.13,-1.497) ; v1(4.175,2.9) C11.2@4.175,3.688 ; v1(4.575,0.075) v1@4.6,0.075 ; v1(4.964,-2.636) R15.2@5.6,-2 ; C27.2@5.153,0.922 C27.2@5.3,0.775 ; v1(5.175,17.95) C13.2@6.075,17.95 ; v1(6.675,2.9) C8.2@6.675,3.688 ; C5.2@7.325,17.95 v1(7.325,18.85) ; C12.2@9.3,3.325 9.377,3.402 10.143,3.402 v1(10.2,3.345) ; C12.2@9.375,3.75 v1(10.011,4.386) ; C6.2@12.25,6.475 12.45,6.675 v1(13.195,6.675) 13.945,7.425 U4.4@13.945,7.95 ; v1(12.915,12.791) C7.2@13.552,12.155 ; U6.1@18.81,-2 21.2,-2 C25.2@21.475,-2.275 ; C15.1@19.425,2.575 v1(19.425,3.475) ; v1(19.523,15.87) R19_D3.1@19.523,16.524 ; C29_D3.2@22.019,26.114 22.019,25.674 22.619,25.074 v1(23.273,25.074) ; C29_D3.2@22.623,26.099 v1(23.277,26.099) ; C29_D3.2@22.648,27.149 v1(23.302,27.149) ; v1(25.5,-1.55) R12.1@26.4,-1.55 ; C20.2@26.4,9.05 v1(26.4,9.95) ; v1(29.2,3.875) 31.05,3.875 32.15,2.775 C23.2@32.3,2.775 32.45,2.775 34.05,1.175 v1(34.975,1.175) C22.2@35.9,1.175 36.2,1.475 v1(36.2,3.3) 35.9,3.6 U5.3@34.7,3.6 ; v1(29.523,15.87) R19_D2.1@29.523,16.524 ; C29_D2.2@32.019,26.114 32.019,25.674 32.619,25.074 v1(33.273,25.074) ; C29_D2.2@32.623,26.099 v1(33.277,26.099) ; C29_D2.2@32.648,27.149 v1(33.302,27.149) ; v1(34.325,8.4) C19.2@34.325,9.3 ; C16.2@34.325,10.55 v1(35.225,10.55) ; v1(36.775,7.975) C10.2@37.675,7.975 ; v1(38.65,-0.125) C24.1@39.55,-0.125 ; v1(39.523,15.87) R19_D1.1@39.523,16.524 ; R5.2@41.25,12.925 v1(42.15,12.925) ; C29_D1.2@42.019,26.114 42.019,25.674 42.619,25.074 v1(43.273,25.074) ; C29_D1.2@42.623,26.099 v1(43.277,26.099) ; C29_D1.2@42.648,27.149 v1(43.302,27.149)
  Top Layer w0.4: C27.2@5.3,0.775 5.95,0.125 6.175,0.125 6.412,-0.113
  Top Layer w0.5: J1.S1@-7.8,8.925 J1.S3@-4.42,8.925 -3.778,8.925 -3.593,8.74 -3.593,8.098 -3.469,7.974 -3.469,7.604 J1.A1@-3.44,7.575 ; J1.B1@-4.79,1.625 -4.79,-1.435 -3.175,-3.05 1.45,-3.05 C26.2@3.9,-0.6 ; J1.B12@-4.79,7.575 J1.S3@-4.79,8.74 ; J1.S4@-4.42,0.275 -3.778,0.275 -3.593,0.46 -3.593,1.102 -3.469,1.226 -3.469,1.596 J1.A12@-3.44,1.625 ; C1.2@2.988,3.688 4.175,3.688 4.288,3.8 C14.2@5.425,3.8 ; v1(4.575,0.075) C26.2@3.9,-0.6 ; v1@4.6,0.075 C27.2@5.3,0.775 ; C27.2@5.153,0.922 5.111,0.881 4.494,0.881 v1(4.475,0.9) 4.448,0.9 4.098,0.55 3.9,0.55 C26.2@3.9,-0.6 ; C14.2@5.425,3.688 6.675,3.688 C2.2@7.925,3.688
  Top Layer w0.54: v1(2.875,2.9) 2.875,1.325 3.65,0.55 3.9,0.55
  Top Layer w0.6: C2.2@7.925,3.575 C12.2@9.175,3.575
  Bottom Layer w0.3: U8_D3.21@16.482,21.658 U8_D3.21@17.582,21.658 ; U8_D3.21@17.582,20.558 U8_D3.21@17.582,21.658 ; U8_D3.21@17.582,22.758 U8_D3.21@17.582,21.658 ; U8_D3.21@18.682,21.658 U8_D3.21@17.582,21.658 ; U8_D2.21@26.482,21.658 U8_D2.21@27.582,21.658 ; U8_D2.21@27.582,20.558 U8_D2.21@27.582,21.658 ; U8_D2.21@27.582,22.758 U8_D2.21@27.582,21.658 ; v1(28.65,5.43) 29.2,4.88 v1(29.2,3.875) ; U8_D2.21@28.682,21.658 U8_D2.21@27.582,21.658 ; U8_D1.21@36.482,21.658 U8_D1.21@37.582,21.658 ; U8_D1.21@37.582,20.558 U8_D1.21@37.582,21.658 ; U8_D1.21@37.582,22.758 U8_D1.21@37.582,21.658 ; U8_D1.21@38.682,21.658 U8_D1.21@37.582,21.658
  other v1: 38.825,-2.8 34.75,-2.575 38.8,-1.55 34.825,-1.3 23.575,-1.175 33.25,1.975 23.5,2.25 14.975,4.175 17,6.275 14.35,7.25 42.45,10.025 42.475,11.075 42.45,12.05 43.575,15.425 41.725,15.45 42.7,16.075 43.6,16.7 41.675,16.775 21.948,23.299 31.948,23.299 41.948,23.299 21.948,24.274 31.948,24.274 41.948,24.274
  other v2: 6,9.7 7.2,9.7 8.4,9.7 6,10.9 7.2,10.9 8.4,10.9 6,12.1 7.2,12.1 8.4,12.1
I2C0_SCL: R14.1 U2.28 U6.3 | length 82.7
  Top Layer w0.13: v1(-4.175,20.35) -1.575,17.75 -1.575,14.225 -1.025,13.675 2.6,13.675 3.26,14.335 U2.28@4.6,14.335 ; R14.1@11.2,1.35 11.785,0.765 11.785,-0.05 13.73,-1.995 U6.3@13.73,-2 ; R14.1@11.325,1.7 R14.1@11.438,1.588
  Bottom Layer w0.13: v1(-4.175,20.35) -6.06,22.235 -8.44,22.235 -8.91,21.765 -8.91,-2.84 -7.84,-3.91 -4.285,-3.91 -2.975,-2.6 -2.975,1.146 -2.925,1.304 -0.179,4.05 2.975,4.05 3.68,3.345 3.68,1.993 3.985,1.687 3.985,-0.031 5.804,-1.85 9.325,-1.85 10.475,-0.7 12.43,-0.7 13.73,-2 U6.3@13.73,-2.1
I2C0_SDA: R13.1 U2.27 U6.4 | length 79.2
  Top Layer w0.13: v1(-3.75,21.125) -1.225,18.6 -1.225,14.525 -0.85,14.15 2.4,14.15 3.45,15.2 4.725,15.2 5,14.925 U2.27@5,14.335 ; U6.4@11.19,-2 R13.1@11.19,0.29
  Bottom Layer w0.13: v1(-3.75,21.125) -4.575,21.125 -5.95,22.5 -8.55,22.5 -9.175,21.875 -9.175,-2.95 -7.95,-4.175 -4.175,-4.175 -2.675,-2.675 -2.675,-0.475 ccw(c-2.805,-0.475) -2.677,-0.454 cw(c0,0) -2.677,0.454 ccw(c-2.805,0.475) -2.675,0.475 -2.675,1.2 -0.075,3.8 2.85,3.8 3.43,3.22 3.43,1.889 3.735,1.584 3.735,-0.135 5.7,-2.1 U6.4@11.19,-2.1
LDOA_CC: C24.2 U5.6 | length 3.2
  Top Layer w0.2: U5.6@38.9,3.6 38.948,3.552 39.752,3.552 39.97,3.334 39.97,2.765 39.55,2.345 C24.2@39.55,1.475
NetC17_2: C17.2 U2.20 Y1.1 | length 7.3
  Top Layer w0.2: U2.20@7.8,14.335 7.8,15.261 8.514,15.975 10.025,15.975 10.925,16.875 11.425,16.375 C17.2@13.275,16.375
NetC18_2: C18.2 R4.2 Y1.2 | length 6.7
  Top Layer w0.2: R4.2@8.6,18.725 8.6,20.2 9.275,20.875 10.925,20.875 11.5,21.45 C18.2@13.275,21.45